# EAGLE board budicLED (EAGLE 7.2.0)
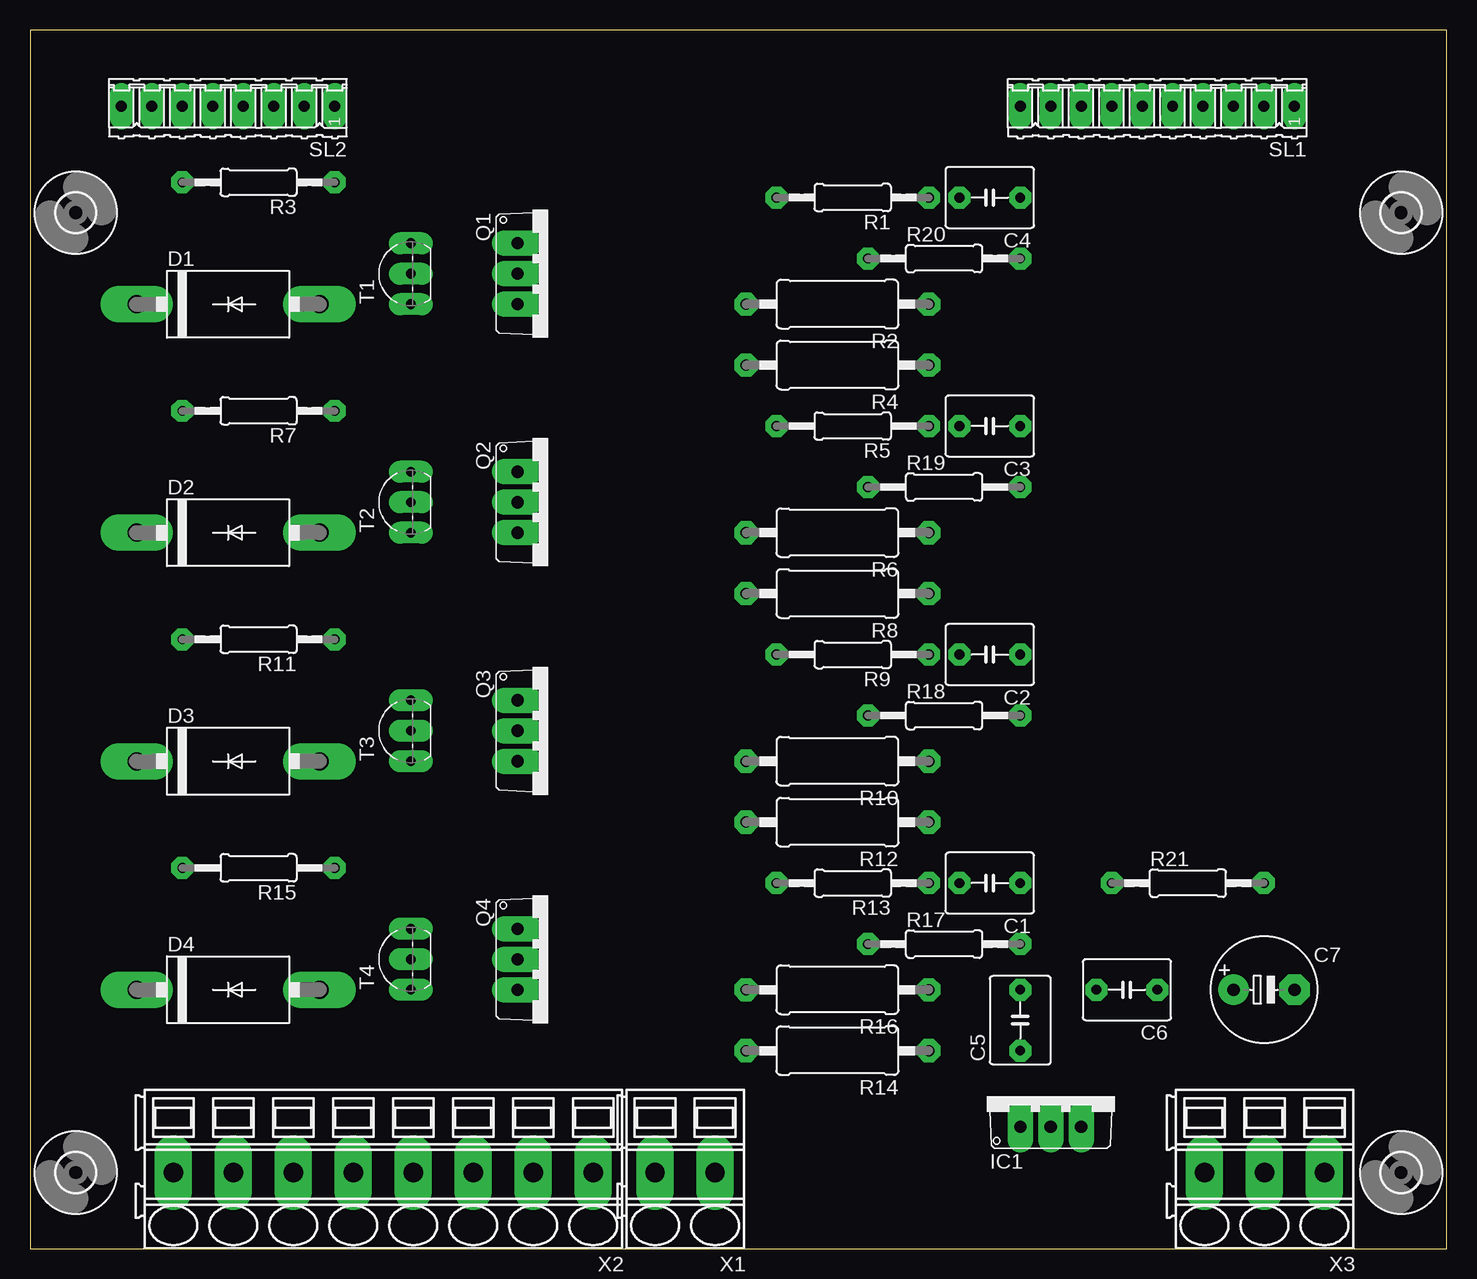
[diagram p0: board, top side]
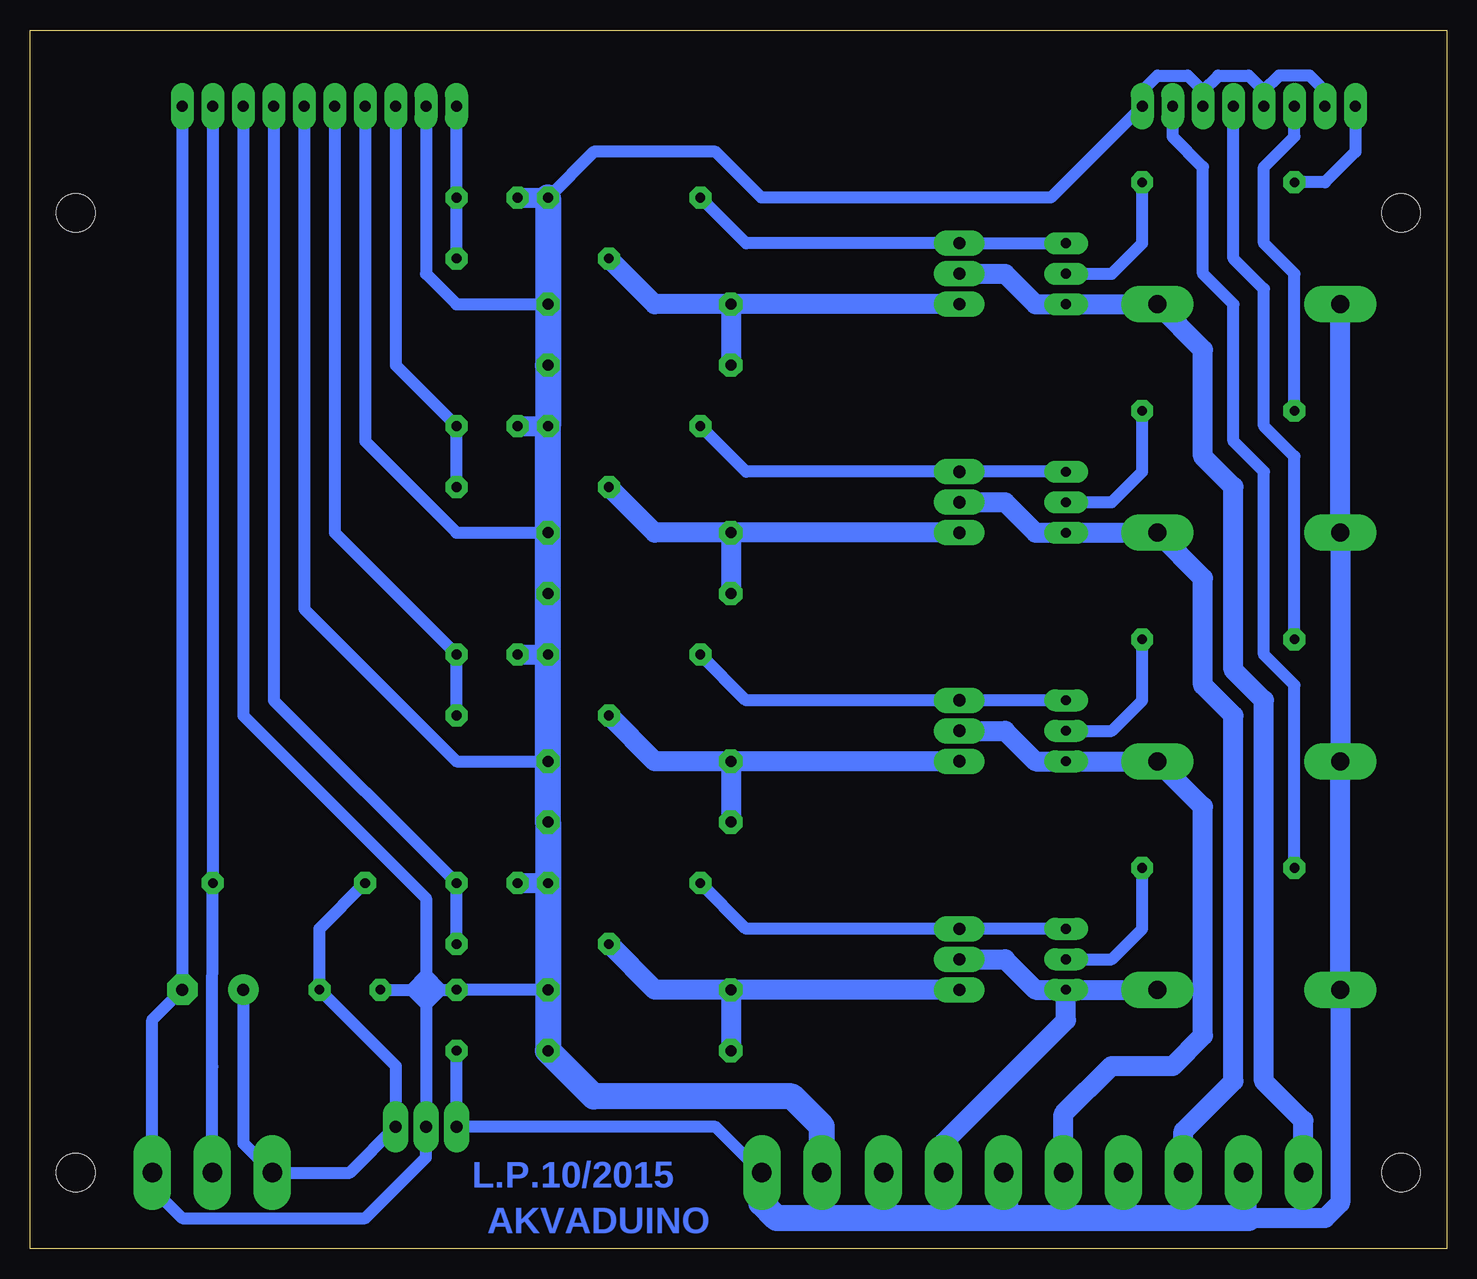
[diagram p1: board, bottom side, seen from below]

Size 118.11 x 101.6 mm. Coordinates in mm from the lower left corner, seen from the top.
Outline: 0,0 118.11,0 118.11,101.6 0,101.6 0,0
Copper layers (1*16): Top 0.035mm / dielectric 1.5mm / Bottom 0.035mm
Design rules "default *": minimum track width 10mil, minimum drill 24mil, track to track 8mil, track to pad 8mil, pad to pad 8mil, via to via 8mil, smd to smd 8mil, copper to edge 40mil, drill to drill 8mil, minimum pad ring 20mil, minimum via ring 8mil, stop-mask expansion 4mil, vias tented up to drill 0mil, thermal gap 10mil

## Footprints (pad centres in the part's own frame; a part is rotated, then mirrored left to right if it is on the bottom)
C050-050X075 = drill 0.813 octagon: 1 -2.54,0; 2 2.54,0
E5-8,5 = drill 1.016 pad 2.54: + -2.54,0 | drill 1.016 pad 2.54 octagon: - 2.54,0
DO201-15 = drill 1.499 long: A 7.62,0; C -7.62,0
TO220V = drill 1.016 long: 1 -2.54,-2.54; 2 0,-2.54; 3 2.54,-2.54
0207/12 = drill 0.813 octagon: 1 -6.35,0; 2 6.35,0
0411/15 = drill 0.914 octagon: 1 -7.62,0; 2 7.62,0
10P = drill 0.914 long: 1 -11.43,0; 2 -8.89,0; 3 -6.35,0; 4 -3.81,0; 5 -1.27,0; 6 1.27,0; 7 3.81,0; 8 6.35,0; 9 8.89,0; 10 11.43,0
08P = drill 0.914 long: 1 -8.89,0; 2 -6.35,0; 3 -3.81,0; 4 -1.27,0; 5 1.27,0; 6 3.81,0; 7 6.35,0; 8 8.89,0
TO92-CBE = drill 0.813 long: B 0,0; C -2.54,0; E 2.54,0
3,2 = hole 3.2: 0,0
SMKDSP_1,5/2 = drill 1.6 pad 1.8 long: 1 -2.5,0; 2 2.5,0
SMKDSP_1,5/8 = drill 1.6 pad 1.8 long: 1 -2.5,0; 2 2.5,0; 3 7.5,0; 4 12.5,0; 5 17.5,0; 6 22.5,0; 7 27.5,0; 8 32.5,0
SMKDSP_1,5/3 = drill 1.6 pad 1.8 long: 1 -2.5,0; 2 2.5,0; 3 7.5,0

## Placement (x,y rotation side)
C1  330n  [C050-050X075]  80.01,30.48 180 top
C2  330n  [C050-050X075]  80.01,49.53 180 top
C3  330n  [C050-050X075]  80.01,68.58 180 top
C4  330n  [C050-050X075]  80.01,87.63 180 top
C5  330n  [C050-050X075]  82.55,19.05 90 top
C6  100n  [C050-050X075]  91.44,21.59 180 top
C7  10u  [E5-8,5]  102.87,21.59 0 top
D1  [DO201-15]  16.51,78.74 0 top
D2  [DO201-15]  16.51,59.69 0 top
D3  [DO201-15]  16.51,40.64 0 top
D4  [DO201-15]  16.51,21.59 0 top
IC1  7805TV  [TO220V]  85.09,12.7 0 top
Q1  BD243C  [TO220V]  43.18,81.28 270 top
Q2  BD243C  [TO220V]  43.18,62.23 270 top
Q3  BD243C  [TO220V]  43.18,43.18 270 top
Q4  BD243C  [TO220V]  43.18,24.13 270 top
R1  1k  [0207/12]  68.58,87.63 180 top
R2  1R  [0411/15]  67.31,78.74 180 top
R3  220R  [0207/12]  19.05,88.9 180 top
R4  1R  [0411/15]  67.31,73.66 180 top
R5  1k  [0207/12]  68.58,68.58 180 top
R6  1R  [0411/15]  67.31,59.69 180 top
R7  220R  [0207/12]  19.05,69.85 180 top
R8  1R  [0411/15]  67.31,54.61 180 top
R9  1k  [0207/12]  68.58,49.53 180 top
R10  1R  [0411/15]  67.31,40.64 180 top
R11  220R  [0207/12]  19.05,50.8 180 top
R12  1R  [0411/15]  67.31,35.56 180 top
R13  1k  [0207/12]  68.58,30.48 180 top
R14  1R  [0411/15]  67.31,16.51 180 top
R15  220R  [0207/12]  19.05,31.75 180 top
R16  1R  [0411/15]  67.31,21.59 180 top
R17  4k7  [0207/12]  76.2,25.4 0 top
R18  4k7  [0207/12]  76.2,44.45 0 top
R19  4k7  [0207/12]  76.2,63.5 0 top
R20  4k7  [0207/12]  76.2,82.55 0 top
R21  4k7  [0207/12]  96.52,30.48 0 top
SL1  [10P]  93.98,95.25 180 top
SL2  [08P]  16.51,95.25 180 top
T1  2N5551  [TO92-CBE]  31.75,81.28 90 top
T2  2N5551  [TO92-CBE]  31.75,62.23 90 top
T3  2N5551  [TO92-CBE]  31.75,43.18 90 top
T4  2N5551  [TO92-CBE]  31.75,24.13 90 top
U$1  [3,2]  3.81,86.36 0 top
U$2  [3,2]  3.81,6.35 0 top
U$3  [3,2]  114.3,6.35 0 top
U$4  [3,2]  114.3,86.36 0 top
X1  SMKDSP_1,5/2  [SMKDSP_1,5/2]  54.61,6.35 180 top
X2  SMKDSP_1,5/8  [SMKDSP_1,5/8]  44.45,6.35 180 top
X3  SMKDSP_1,5/3  [SMKDSP_1,5/3]  105.41,6.35 180 top

## Library data of the parts
C1-C6 R1-R21 = rcl
C7 = resistor
D1-D4 = diode
IC1 = linear
Q1-Q4 T1-T4 = transistor
SL1 SL2 = con-amp-quick; OC_FARNELL: unknown; OC_NEWARK: unknown
U$1-U$4 = holes
X1 = con-phoenix-smkdsp; MF: FARNELL; MPN: 1733570; OC_FARNELL: 3041244; OC_NEWARK: 69C8588
X2 = con-phoenix-smkdsp; MF: FARNELL; MPN: 1733635; OC_FARNELL: 3041281; OC_NEWARK: 71C4133
X3 = con-phoenix-smkdsp; MF: FARNELL; MPN: 1733583; OC_FARNELL: 3041256; OC_NEWARK: 71C4130

## Nets
+12V: C5.1 D1.C D2.C D3.C D4.C IC1.1 X1.1 X2.1 X2.3 X2.5 X2.7
GND: C1.2 C2.2 C3.2 C4.2 C5.2 C6.2 C7.- IC1.2 R1.1 R2.1 R4.1 R5.1 R6.1 R8.1 R9.1 R10.1 R12.1 R13.1 R14.1 R16.1 SL1.1 SL1.3 SL1.5 SL1.7 SL1.9 SL2.1 SL2.3 SL2.5 SL2.7 X1.2 X3.1
N$1: Q1.1 R1.2 T1.E
N$2: D1.A Q1.2 T1.C X2.8
N$3: R3.1 T1.B
N$4: D2.A Q2.2 T2.C X2.6
N$5: D3.A Q3.2 T3.C X2.4
N$6: Q2.1 R5.2 T2.E
N$7: D4.A Q4.2 T4.C X2.2
N$8: R7.1 T2.B
N$9: Q3.1 R9.2 T3.E
N$10: R3.2 SL2.8
N$11: R11.1 T3.B
N$12: Q4.1 R13.2 T4.E
N$13: R7.2 SL2.6
N$14: R15.1 T4.B
N$15: R11.2 SL2.4
N$16: R15.2 SL2.2
N$17: C4.1 R20.2 SL1.10
N$18: C2.1 R18.2 SL1.6
N$19: C3.1 R19.2 SL1.8
N$20: C1.1 R17.2 SL1.4
N$21: R21.2 SL1.2 X3.2
N$23: C6.1 C7.+ IC1.3 R21.1 X3.3
SENS1: Q4.3 R14.2 R16.2 R17.1
SENS2: Q3.3 R10.2 R12.2 R18.1
SENS3: Q2.3 R6.2 R8.2 R19.1
SENS4: Q1.3 R2.2 R4.2 R20.1

## Tracks (layer width: path | path; a pad name or v marks a point on that pad's centre or on a via)
+12V
  Bottom 1.016: 8.89,41.91 D3.C | X2.3 36.83,6.35 | X1.1 57.15,6.31 57.15,6.35 60.96,10.16 IC1.1 C5.1 | 46.95,2.58 46.99,2.54 | 26.95,2.82 26.67,2.54 | 16.95,2.98 16.51,2.54
  Bottom 1.676: D1.C D2.C 8.89,41.91 D4.C 8.89,3.81 10.16,2.54 16.51,2.54
  Bottom 2.184: 16.51,2.54 26.67,2.54 36.83,2.54 | 36.83,2.54 46.99,2.54 55.88,2.54 57.15,3.81 57.15,6.31 | X2.1 46.95,2.58 | 36.83,6.35 36.83,2.54 | X2.5 26.95,2.82 | X2.7 16.95,2.98
GND
  Bottom 1.016: 85.09,21.59 85.09,20.32 | 85.09,20.32 IC1.2 85.09,7.62 90.17,2.54 105.41,2.54 107.91,5.04 X3.1 107.91,19.09 C7.- SL1.1 | R16.1 C5.2 83.82,21.59 | C6.2 86.36,21.59 | 86.36,21.59 85.09,21.59 | 85.09,21.59 83.82,21.59 | SL1.9 85.09,81.28 82.55,78.74 R2.1 | SL1.7 90.17,67.31 82.55,59.69 R6.1 | SL1.5 95.25,53.34 82.55,40.64 R10.1 | SL1.3 100.33,44.45 85.09,29.21 85.09,22.86 | 85.09,22.86 85.09,21.59 | R1.1 71.12,91.44 60.96,91.44 57.15,87.63 33.02,87.63 SL2.1 25.4,96.52 24.13,97.79 21.59,97.79 20.32,96.52 | SL2.7 10.16,96.52 11.43,97.79 13.97,97.79 15.24,96.52 | 15.24,96.52 SL2.5 | SL2.3 20.32,96.52 | 20.32,96.52 19.05,97.79 16.51,97.79 15.24,96.52 | 83.82,21.59 85.09,22.86 | 85.09,22.86 86.36,21.59 | 86.36,21.59 85.09,20.32 | 85.09,20.32 83.82,21.59
  Bottom 1.676: C3.2 R5.1 | C4.2 R1.1 | C2.2 R9.1 | C1.2 R13.1
  Bottom 2.184: X1.2 52.11,10.2 54.61,12.7 71.12,12.7 R14.1 R16.1 R13.1 R12.1 R10.1 R9.1 R8.1 R6.1 R5.1 R4.1 R2.1 R1.1
N$1
  Bottom 1.016: T1.E Q1.1 58.42,83.82 R1.2
N$2
  Bottom 1.676: X2.8 11.95,10.68 15.24,13.97 15.24,45.72 17.78,48.26 17.78,63.5 20.32,66.04 20.32,74.93 D1.A T1.C 34.29,78.74 36.83,81.28 Q1.2
N$3
  Bottom 1.016: T1.B 27.94,81.28 25.4,83.82 R3.1
N$4
  Bottom 1.676: X2.6 21.95,9.8 17.78,13.97 17.78,44.45 20.32,46.99 20.32,55.88 D2.A T2.C 34.29,59.69 36.83,62.23 Q2.2
N$5
  Bottom 1.676: X2.4 31.95,11.23 27.94,15.24 22.86,15.24 20.32,17.78 20.32,36.83 D3.A T3.C 34.29,40.64 36.83,43.18 Q3.2
N$6
  Bottom 1.016: T2.E Q2.1 58.42,64.77 R5.2
N$7
  Bottom 1.676: T4.C D4.A | Q4.2 36.83,24.13 34.29,21.59 T4.C | X2.2 41.95,8.85 31.75,19.05 T4.C
N$8
  Bottom 1.016: T2.B 27.94,62.23 25.4,64.77 R7.1
N$9
  Bottom 1.016: T3.E Q3.1 58.42,45.72 R9.2
N$10
  Bottom 1.016: SL2.8 7.62,91.44 10.16,88.9 R3.2
N$11
  Bottom 1.016: T3.B 27.94,43.18 25.4,45.72 R11.1
N$12
  Bottom 1.016: T4.E Q4.1 58.42,26.67 R13.2
N$13
  Bottom 1.016: R7.2 12.7,81.28 15.24,83.82 15.24,90.17 12.7,92.71 SL2.6
N$14
  Bottom 1.016: T4.B 27.94,24.13 25.4,26.67 R15.1
N$15
  Bottom 1.016: R11.2 12.7,66.04 15.24,68.58 15.24,80.01 17.78,82.55 SL2.4
N$16
  Bottom 1.016: R15.2 12.7,46.99 15.24,49.53 15.24,64.77 17.78,67.31 17.78,78.74 20.32,81.28 20.32,90.17 22.86,92.71 SL2.2
N$17
  Bottom 1.016: R20.2 C4.1 SL1.10
N$18
  Bottom 1.016: R18.2 C2.1 92.71,59.69 SL1.6
N$19
  Bottom 1.016: R19.2 C3.1 87.63,73.66 SL1.8
N$20
  Bottom 1.016: R17.2 C1.1 97.79,45.72 SL1.4
N$21
  Bottom 1.016: X3.2 102.91,15.2 R21.2 SL1.2
N$23
  Bottom 1.016: R21.1 93.98,26.67 C6.1 87.63,15.24 IC1.3 91.44,6.35 X3.3 100.33,8.77 C7.+
SENS1
  Bottom 1.676: Q4.3 R16.2 | R16.2 R14.2 | R16.2 66.04,21.59 R17.1
SENS2
  Bottom 1.676: R10.2 R12.2 | Q3.3 R10.2 | R10.2 66.04,40.64 R18.1
SENS3
  Bottom 1.676: Q2.3 R6.2 | R6.2 R8.2 | R6.2 66.04,59.69 R19.1
SENS4
  Bottom 1.676: Q1.3 R2.2 | R2.2 R4.2 | R2.2 66.04,78.74 R20.1

## Text on the board
Bottom: L.P.10/2015 | AKVADUINO